# Altium PCB RBG_dot_matrix.PcbDoc
Units mm, origin at the board's own origin, x right, y up, seen from the top; angles counter-clockwise.
Board outline 91.19 x 99.31 mm, 2 copper layers (Top Layer, Bottom Layer); 86 components, 139 nets, 322 pads, 100 vias.
Unrouted connection lines stored in the file: 13.
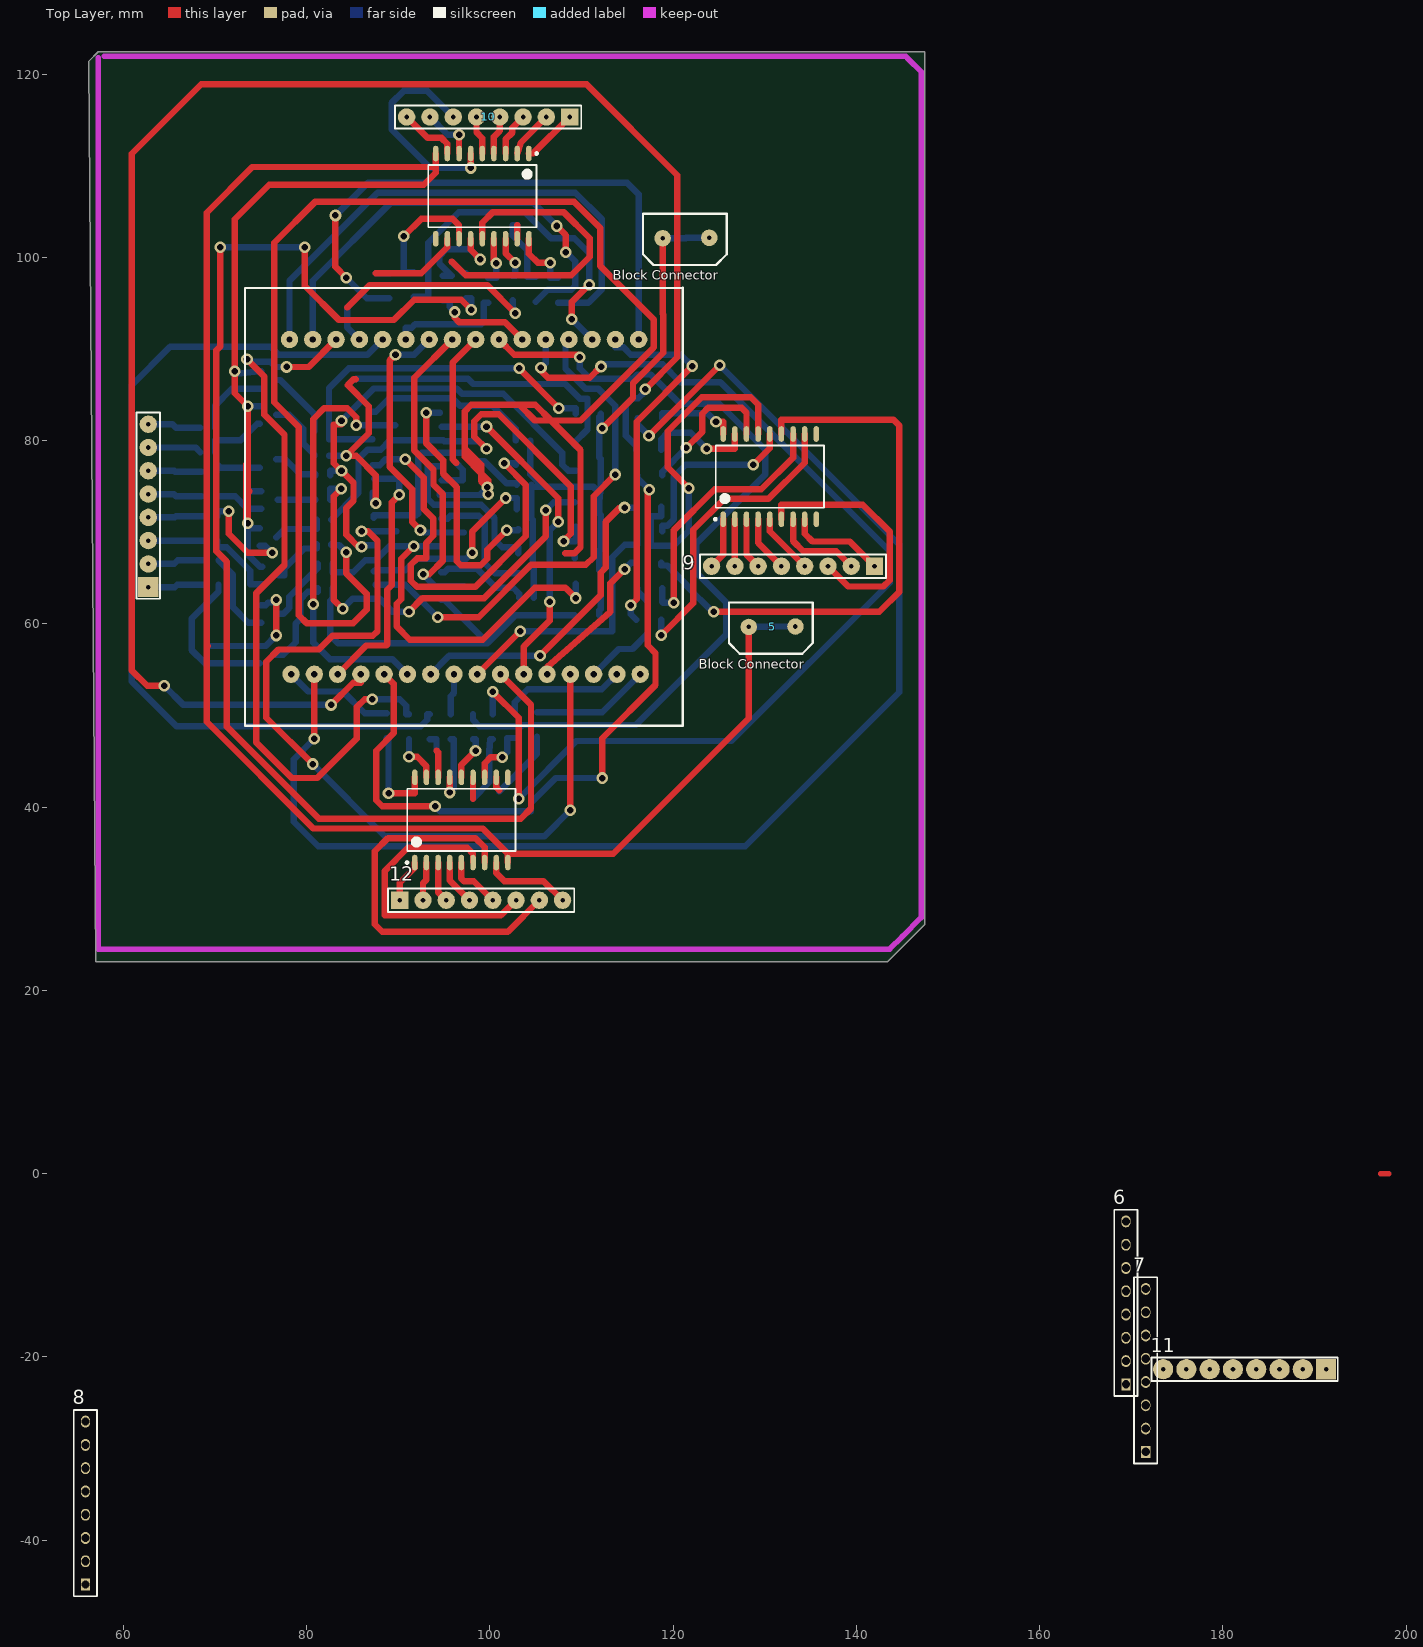
[diagram p0: Top Layer view]
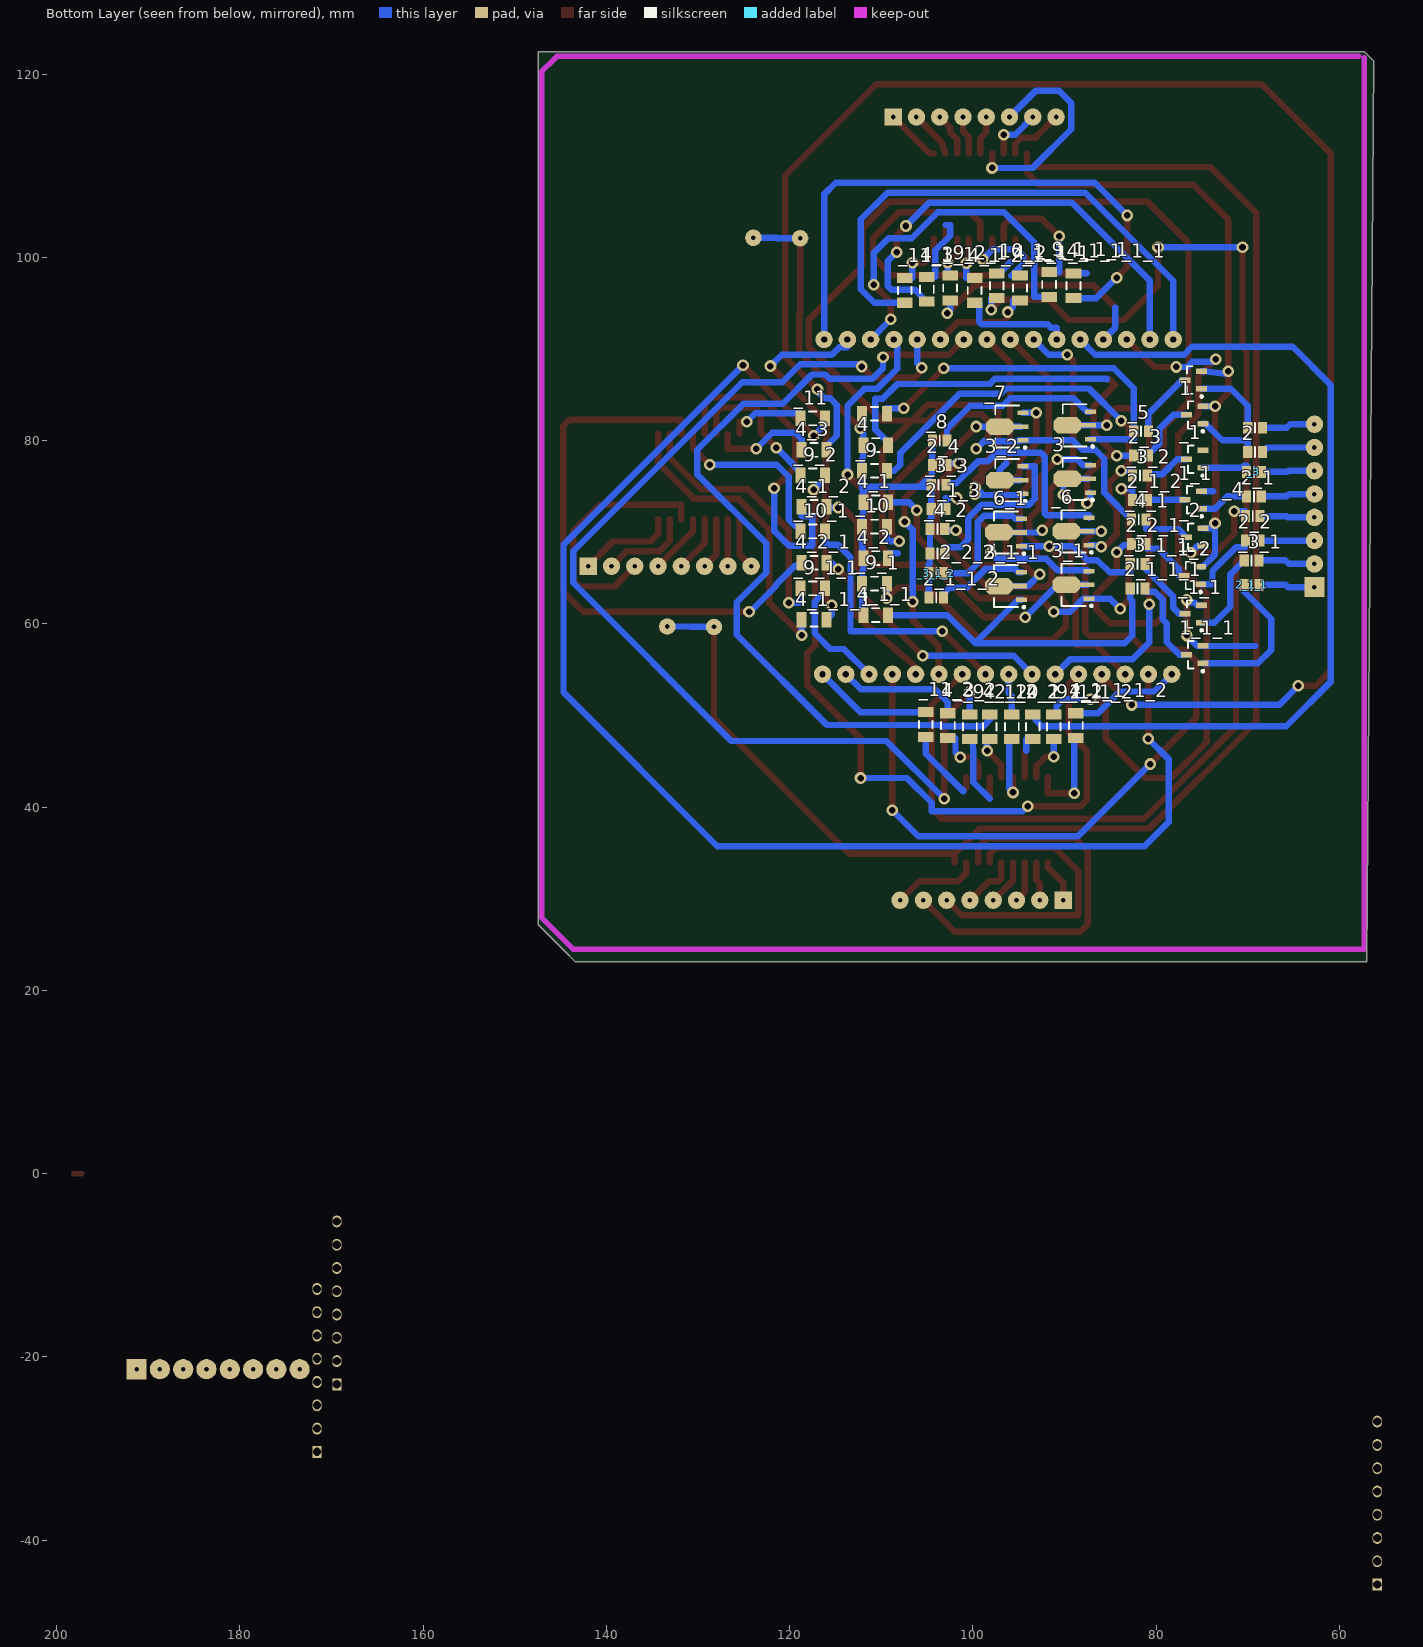
[diagram p1: Bottom Layer view, seen from below]

## Layer stack, top to bottom
Top Layer: signal copper 0.0356
Dielectric: dielectric 0.32, FR-4, Dk 4.8
Bottom Layer: signal copper 0.0356

## Board outline
56.261,121.412 57.277,122.428 147.447,122.428 147.447,27.178 144.653,24.384 143.383,23.114 57.023,23.114

## Design rules (kind name [scope] priority, off if disabled: settings)
Clearance [All] p1: gap=0.35
PolygonConnect [All] p1: connectstyle=Relief reliefconductorwidth=0.254 reliefentries=4 polygonreliefangle="90 Angle"
RoutingVias [All] p1: holewidth=0.711 width=1.27 viastyle="Through Hole" minholewidth=0.711 minwidth=1.27 maxholewidth=0.711 maxwidth=1.27
SilkscreenOverComponentPads [All] p1: minsilkscreentomaskgap=0.254
SolderMaskExpansion [All] p1: expansion=0.102
Width [All] p1: maxlimit=0.8 minlimit=0.6 preferedwidth=0.7
27 further rules are at their usual default settings.

## Components (designator, comment, footprint, x,y, rotation, side; value= is the part's Value field where it differs from the comment)
1 "Comment" sot23-3l 75.819,82.804 r0 bottom
1_1 "Comment" sot23-3l 75.946,73.533 r0 bottom
1_1_1 "Comment" sot23-3l 75.819,56.642 r0 bottom
1_2 "Comment" sot23-3l 76.073,65.278 r0 bottom
2 "Comment" resc2012l 69.215,78.74 r0 bottom
2_1 "Comment" resc2012l 69.342,73.914 r0 bottom
2_1_1 "Comment" resc2012l 69.596,64.262 r0 bottom
2_1_1_1 "Comment" resc2012l 82.042,63.881 r0 bottom
2_1_1_2 "Comment" resc2012l 104.013,62.865 r0 bottom
2_1_2 "Comment" resc2012l 81.788,73.533 r0 bottom
2_1_3 "Comment" resc2012l 103.759,72.517 r0 bottom
2_2 "Comment" resc2012l 69.469,69.088 r0 bottom
2_2_1 "Comment" resc2012l 81.915,68.707 r0 bottom
2_2_2 "Comment" resc2012l 103.886,67.691 r0 bottom
2_3 "Comment" resc2012l 81.661,78.359 r0 bottom
2_4 "Comment" resc2012l 103.632,77.343 r0 bottom
3 "Comment" sot89l 88.9,75.819 r0 bottom
3_1 "Comment" sot89l 89.027,64.262 r0 bottom
3_1_1 "Comment" sot89l 96.393,64.135 r0 bottom
3_2 "Comment" sot89l 96.266,75.692 r0 bottom
4 "Comment" resc3216l 110.617,79.502 r0 bottom
4_1 "Comment" resc3216l 110.617,73.279 r0 bottom
4_1_1 "Comment" resc3216l 110.617,60.96 r0 bottom
4_1_1_1 "Comment" resc3216l 117.348,60.452 r0 bottom
4_1_1_1_1 "Comment" resc3216l 89.027,96.901 r90 bottom
4_1_1_1_2 "Comment" resc3216l 88.773,48.895 r90 bottom
4_1_2 "Comment" resc3216l 117.348,72.771 r0 bottom
4_1_2_1 "Comment" resc3216l 99.822,96.393 r90 bottom
4_1_2_2 "Comment" resc3216l 98.171,48.768 r90 bottom
4_2 "Comment" resc3216l 110.617,67.183 r0 bottom
4_2_1 "Comment" resc3216l 117.348,66.675 r0 bottom
4_2_1_1 "Comment" resc3216l 94.869,96.647 r90 bottom
4_2_1_2 "Comment" resc3216l 93.472,48.768 r90 bottom
4_3 "Comment" resc3216l 117.348,78.994 r0 bottom
4_3_1 "Comment" resc3216l 105.029,96.52 r90 bottom
4_3_2 "Comment" resc3216l 102.743,48.895 r90 bottom
5 "Comment" "pcb block connector" 130.81,59.69 r0 top
6 "Comment" HDR1X8#1 169.418,-22.987 r90 top
7 "Comment" HDR1X8#1 171.577,-30.353 r90 top
8 "Comment" HDR1X8#1 55.88,-44.831 r90 top
9 "Comment" HDR1X8#2 141.986,66.294 r180 top
10 "Comment" HDR1X8#2 108.712,115.316 r180 top
11 "Comment" HDR1X8#3 191.262,-21.336 r180 top
12 "Comment" HDR1X8#2 90.17,29.845 r0 top
_1 "Comment" sot23-3l 75.819,77.978 r0 bottom
_1_1 "Comment" sot23-3l 75.946,61.087 r0 bottom
_2 "Comment" sot23-3l 75.819,69.469 r0 bottom
_3 "Comment" resc2012l 69.342,76.581 r0 bottom
_3_1 "Comment" resc2012l 69.596,66.929 r0 bottom
_3_1_1 "Comment" resc2012l 82.042,66.548 r0 bottom
_3_1_2 "Comment" resc2012l 104.013,65.532 r0 bottom
_3_2 "Comment" resc2012l 81.788,76.2 r0 bottom
_3_3 "Comment" resc2012l 103.759,75.184 r0 bottom
_4 "Comment" resc2012l 69.469,71.755 r0 bottom
_4_1 "Comment" resc2012l 81.915,71.374 r0 bottom
_4_2 "Comment" resc2012l 103.886,70.358 r0 bottom
_5 "Comment" resc2012l 81.661,81.026 r0 bottom
_6 "Comment" sot89l 89.027,70.104 r0 bottom
_6_1 "Comment" sot89l 96.393,69.977 r0 bottom
_7 "Comment" sot89l 96.266,81.534 r0 bottom
_8 "Comment" resc2012l 103.632,80.01 r0 bottom
_9 "Comment" resc3216l 110.744,76.708 r0 bottom
_9_1 "Comment" resc3216l 110.744,64.389 r0 bottom
_9_1_1 "Comment" resc3216l 117.475,63.881 r0 bottom
_9_1_1_1 "Comment" resc3216l 91.694,97.028 r90 bottom
_9_1_1_2 "Comment" resc3216l 91.186,48.768 r90 bottom
_9_2 "Comment" resc3216l 117.475,76.2 r0 bottom
_9_2_1 "Comment" resc3216l 102.489,96.647 r90 bottom
_9_2_2 "Comment" resc3216l 100.33,48.768 r90 bottom
_10 "Comment" resc3216l 110.744,70.612 r0 bottom
_10_1 "Comment" resc3216l 117.475,70.104 r0 bottom
_10_1_1 "Comment" resc3216l 97.409,96.901 r90 bottom
_10_1_2 "Comment" resc3216l 95.758,48.768 r90 bottom
_11 "Comment" resc3216l 117.475,82.423 r0 bottom
_11_1 "Comment" resc3216l 107.442,96.393 r90 bottom
_11_2 "Comment" resc3216l 105.156,49.022 r90 bottom
? "Comment" soic127p1030-18al 96.901,38.608 r90 top
? "Comment" soic127p1030-18al 99.187,106.68 r270 top
? "Comment" soic127p1030-18al 130.556,76.073 r90 top
? "Comment" "pcb block connector" 121.412,102.108 r0 top
? "Comment" HDR1X8#4 62.738,64.008 r90 top
? "Comment" sot89l 88.9,81.661 r0 bottom
? "Comment" sot23-3l 75.946,86.614 r0 bottom
? "Comment" resc3216l 110.744,82.931 r0 bottom
? "Comment" resc2012l 69.215,81.407 r0 bottom
? "Comment" "RGB 4.7X4.7" 97.282,72.771 r180 top

## Footprints (in the part's own frame and the unit in brackets; to place one, negate y for a bottom-side part, rotate by r counter-clockwise, add the part's x,y. Pads: shape width x height; smd on the part's side, far side on the other; paste and mask are expansions set on the pad)
HDR1X8#1 [mm] "Connector; Header; 8 Position"
  rect 1.3x1 hole 0.9: 1(0,0)
  oval 1.3x1 hole 0.9: 2(2.54,0) 3(5.08,0) 4(7.62,0) 5(10.16,0) 6(12.7,0) 7(15.24,0) 8(17.78,0)
  silkscreen extent -1.27,-1.27 19.05,1.27
HDR1X8#2 [mm] "Connector; Header; 8 Position"
  rect 1.9x1.9 hole 0.5: 1(0,0)
  round 1.9 hole 0.5: 2(2.54,0) 3(5.08,0) 4(7.62,0) 5(10.16,0) 6(12.7,0) 7(15.24,0) 8(17.78,0)
  silkscreen extent -1.27,-1.27 19.05,1.27
HDR1X8#3 [mm] "Connector; Header; 8 Position"
  rect 2.2x2.2 hole 0.5: 1(0,0)
  round 2.2 hole 0.5: 2(2.54,0) 3(5.08,0) 4(7.62,0) 5(10.16,0) 6(12.7,0) 7(15.24,0) 8(17.78,0)
  silkscreen extent -1.27,-1.27 19.05,1.27
HDR1X8#4 [mm] "Connector; Header; 8 Position"
  rect 2.2x2.2 hole 0.5: 1(0,0)
  round 1.9 hole 0.5: 2(2.54,0) 3(5.08,0) 4(7.62,0) 5(10.16,0) 6(12.7,0) 7(15.24,0) 8(17.78,0)
  silkscreen extent -1.27,-1.27 19.05,1.27
"pcb block connector" [mm]
  round 1.8 hole 0.5: 1(-2.547,-0.023) 2(2.547,0.023)
  silkscreen extent -4.7,-2.94 4.44,2.65
resc2012l [mm] "Chip Resistor, Body 2.0x1.3mm, IPC High Density"
  rect 1x1.3 smd: 1(-0.8,0) 2(0.8,0)
  silkscreen extent 0,-0.55 0,0.55, body extent -1.07,-0.7 1.07,0.7, height 0.65
resc3216l [mm] "Chip Resistor, Body 3.2x1.6mm, IPC High Density"
  rect 1.1x1.7 smd: 1(-1.35,0) 2(1.35,0)
  silkscreen extent -0.4,-0.75 0.4,0.75, body extent -1.68,-0.87 1.68,0.87, height 0.71
"RGB 4.7X4.7" [mm]
  round 1.9 hole 0.7: 1(-18.966,-18.262) 2(-16.426,-18.262) 3(-13.886,-18.262) 4(-11.346,-18.262) 5(-8.806,-18.262) 6(-6.266,-18.262) 7(-3.726,-18.262) 8(-1.186,-18.262) 9(1.354,-18.262) 10(3.894,-18.262) 11(6.434,-18.262) 12(8.974,-18.262) 13(11.514,-18.262) 14(14.054,-18.262) 15(16.594,-18.262) 16(19.134,-18.262) 17(18.966,18.262) 18(16.426,18.262) 19(13.886,18.262) 20(11.346,18.262) 21(8.806,18.262) 22(6.266,18.262) 23(3.726,18.262) 24(1.186,18.262) 25(-1.354,18.262) 26(-3.894,18.262) 27(-6.434,18.262) 28(-8.974,18.262) 29(-11.514,18.262) 30(-14.054,18.262) 31(-16.594,18.262) 32(-19.134,18.262)
  silkscreen extent -23.78,-23.9 23.99,23.89
soic127p1030-18al [mm] "SOIC, 18-Leads, Body 11.6x7.5mm, Pitch 1.27mm, IPC High Density"
  oval 1.7x0.6 smd: 1(-4.65,5.08) 2(-4.65,3.81) 3(-4.65,2.54) 4(-4.65,1.27) 5(-4.65,0) 6(-4.65,-1.27) 7(-4.65,-2.54) 8(-4.65,-3.81) 9(-4.65,-5.08) 10(4.65,-5.08) 11(4.65,-3.81) 12(4.65,-2.54) 13(4.65,-1.27) 14(4.65,0) 15(4.65,1.27) 16(4.65,2.54) 17(4.65,3.81) 18(4.65,5.08)
  silkscreen extent -4.77,-5.9 3.4,6.05, body extent -3.8,-5.85 3.8,5.85, height 2.65
sot23-3l [mm] "SOT23, 3-Leads, Body 2.9x1.3mm, Pitch 0.95mm, Lead Span 2.5mm, IPC High Density"
  rect 1.2x0.6 smd: 1(-0.9,0.95) 2(-0.9,-0.95) 3(0.9,0)
  silkscreen extent -1.02,-1.5 0.7,1.92, body extent -0.7,-1.5 0.7,1.5, height 1.1
sot89l [mm] "SOT89, 3-Leads, Body 4.5x2.4 mm, Pitch 1.5mm, Lead Span 4.1mm, IPC High Density"
  rect 1.2x0.5 smd: 1(-1.7,1.5) 3(-1.7,-1.5)
  rect 1.6x0.5 smd: 2(-1.5,0)
  oct 3x1.8 smd: 2(0.8,0)
  silkscreen extent -2.07,-2.3 1.3,2.42, body extent -1.3,-2.3 1.3,2.3, height 1.6

## Via types
v1: diameter 1.27, hole 0.711, Top Layer to Bottom Layer, 100 vias

## Nets (pads, with @x,y where several pads share a name; then routed paths per layer and width w, separated by ;. In a path a pad name is that pad's centre, name@x,y a point inside that pad or via, vN(x,y) a via of type N, cw(c..) or ccw(c..) an arc to the next point about the centre after c; other vN are vias at no path point)
a1: ?.1@68.415,81.407 ?.8@62.738,81.788 | length 5.8
  Bottom Layer w0.7: ?.8@62.738,81.788 65.38,81.788 65.761,81.407 ?.1@68.415,81.407
a2: 2.1 ?.7@62.738,79.248 | length 5.9
  Bottom Layer w0.7: ?.7@62.738,79.248 67.907,79.248 2.1
a3: ?.6@62.738,76.708 _3.1 | length 5.9
  Bottom Layer w0.7: ?.6@62.738,76.708 65.557,76.708 65.684,76.581 _3.1
a4: 2_1.1 ?.5@62.738,74.168 | length 5.9
  Bottom Layer w0.7: ?.5@62.738,74.168 65.507,74.168 65.761,73.914 2_1.1
a5: ?.4@62.738,71.628 _4.1 | length 6
  Bottom Layer w0.7: ?.4@62.738,71.628 65.634,71.628 65.761,71.755 _4.1
a6: 2_2.1 ?.3@62.738,69.088 | length 5.9
  Bottom Layer w0.7: ?.3@62.738,69.088 2_2.1
a7: ?.2@62.738,66.548 _3_1.1 | length 6.2
  Bottom Layer w0.7: ?.2@62.738,66.548 65.557,66.548 65.938,66.929 _3_1.1
a8: 2_1_1.1 ?.1@62.738,64.008 | length 6.2
  Bottom Layer w0.7: ?.1@62.738,64.008 65.634,64.008 65.888,64.262 2_1_1.1
c1: 10.1 ?.1@104.267,111.33 | length 6.1
  Top Layer w0.7: ?.1@104.267,111.33 104.726,111.33 10.1
c2: 10.2 ?.2@102.997,111.33 | length 5.2
  Top Layer w0.7: ?.2@102.997,111.33 103.429,112.573 10.2
c3: 10.3 ?.3@101.727,111.33 | length 4.8
  Top Layer w0.7: ?.3@101.727,111.33 101.727,112.878 102.472,113.623 102.472,114.156 10.3
c4: 10.4 ?.4@100.457,111.33 | length 4.2
  Top Layer w0.7: ?.4@100.457,111.33 100.457,113.158 101.092,113.793 10.4
c5: 10.5 ?.5@99.187,111.33 | length 4.2
  Top Layer w0.7: 10.5 98.552,113.64 99.187,113.005 ?.5@99.187,111.33
c6: 10.6 ?.6@97.917,111.33 | length 23.3
  Top Layer w0.7: v1(97.917,109.753) ?.6@97.917,111.33
  Bottom Layer w0.7: 10.6 93.167,118.161 90.602,118.161 89.281,116.84 89.281,113.97 93.497,109.753 v1(97.917,109.753)
c7: 10.7 ?.7@96.647,111.33 | length 6
  Top Layer w0.7: ?.7@96.647,111.33 v1(96.647,113.386)
  Bottom Layer w0.7: 10.7 95.402,113.386 v1(96.647,113.386)
c8: 10.8 ?.8@95.377,111.33 | length 6.7
  Top Layer w0.7: 10.8 93.218,113.03 94.742,113.03 95.377,112.395 ?.8@95.377,111.33
cc1: 9.8 ?.1@125.476,71.423 | length 5.7
  Top Layer w0.7: 9.8 125.476,67.564 ?.1@125.476,71.423
cc2: 9.7 ?.2@126.746,71.423 | length 5.1
  Top Layer w0.7: 9.7 ?.2@126.746,71.423
cc3: 9.6 ?.3@128.016,71.423 | length 5.7
  Top Layer w0.7: ?.3@128.016,71.423 128.016,67.564 9.6
cc4: 9.5 ?.4@129.286,71.423 | length 6.2
  Top Layer w0.7: ?.4@129.286,71.423 129.286,68.834 9.5
cc5: 9.4 ?.5@130.556,71.423 | length 6.7
  Top Layer w0.7: ?.5@130.556,71.423 130.556,70.104 9.4
cc6: 9.3 ?.6@131.826,71.423 | length 27.8
  Top Layer w0.7: ?.6@131.826,71.423 131.826,73 140.716,73 143.637,70.079 143.637,64.77 142.951,64.084 139.116,64.084 9.3
cc7: 9.2 ?.7@133.096,71.423 | length 9.9
  Top Layer w0.7: ?.7@133.096,71.423 133.096,69.049 134.201,67.944 137.796,67.944 9.2
cc8: 9.1 ?.8@134.366,71.423 | length 10.7
  Top Layer w0.7: ?.8@134.366,71.423 134.366,69.85 135.222,68.994 139.286,68.994 9.1
e1: ?.3@87.2,83.161 _8.1 | length 18.9
  Bottom Layer w0.7: ?.3@87.2,83.161 87.554,83.161 89.026,84.633 95.936,84.633 96.749,83.82 100.292,83.82 102.832,81.28 _8.1
e2: 2_4.1 3.3 | length 45.4
  Top Layer w0.7: v1(90.793,77.953) 92.806,75.94 92.806,72.537 93.842,71.501 93.842,69.603 93.047,68.809 93.047,67.142 92.075,67.142 91.389,66.456 91.389,64.719 92.075,64.033 98.4,64.033 103.937,69.571 103.937,75.159 v1(101.575,77.521)
  Bottom Layer w0.7: 3.3 87.986,77.319 88.619,77.953 v1(90.793,77.953) ; v1(101.575,77.521) 102.832,77.521 2_4.1
e3: _3_3.1 _6.3 | length 23.9
  Bottom Layer w0.7: _6.3 87.325,71.604 87.325,71.842 91.985,71.842 92.177,72.034 92.177,78.257 92.583,78.664 97.423,78.664 98.32,77.766 99.399,77.766 101.829,75.336 102.959,75.336 _3_3.1
e4: 2_1_3.1 3_1.3 | length 21.6
  Top Layer w0.7: v1(98.069,67.742) 98.069,70.053 v1(101.752,73.736)
  Bottom Layer w0.7: 3_1.3 87.528,65.762 87.528,65.862 90.78,65.862 92.024,67.107 97.434,67.107 v1(98.069,67.742) ; v1(101.752,73.736) 102.959,73.736 2_1_3.1
e5: _4_2.1 _7.3 | length 28.2
  Top Layer w0.7: v1(93.087,83.034) 93.087,79.687 94.906,77.868 94.906,76.416 96.393,74.929 96.393,66.839 96.83,66.402 99.015,66.402 99.729,67.116 99.729,68.106 v1(101.854,70.231)
  Bottom Layer w0.7: v1(93.087,83.034) _7.3 ; v1(101.854,70.231) 103.086,70.231 _4_2.1
e6: 2_2_2.1 3_2.3 | length 18.9
  Bottom Layer w0.7: 3_2.3 93.243,77.192 93.243,73.66 93.887,73.016 99.06,73.016 100.519,71.557 100.519,69.215 101.357,68.377 103.086,68.377 2_2_2.1
e7: _3_1_2.1 _6_1.3 | length 13.9
  Bottom Layer w0.7: _6_1.3 95.396,71.477 95.71,71.791 98.798,71.791 99.469,71.12 99.469,66.633 100.57,65.532 _3_1_2.1
e8: 2_1_1_2.1 3_1_1.3 | length 10.2
  Bottom Layer w0.7: 3_1_1.3 95.069,65.635 95.474,66.04 98.577,66.04 100.689,63.929 102.556,63.929 103.213,63.271 2_1_1_2.1
ee1: 4_1_1_1_2.1 ?.18@91.821,43.258 | length 10.8
  Top Layer w0.7: v1(88.951,41.509) 91.821,41.509 ?.18@91.821,43.258
  Bottom Layer w0.7: 4_1_1_1_2.1 88.951,47.545 v1(88.951,41.509)
ee2: ?.17@93.091,43.258 _9_1_1_2.1 | length 5.5
  Top Layer w0.7: v1(91.186,45.491) 92.075,45.491 93.091,44.475 ?.17@93.091,43.258
  Bottom Layer w0.7: v1(91.186,45.491) _9_1_1_2.1
ee3: 4_2_1_2.1 ?.16@94.361,43.258 | length 4.9
  Top Layer w0.7: 94.183,46.177 94.361,45.999 ?.16@94.361,43.258
  Bottom Layer w0.7: 4_2_1_2.1 94.183,47.418 94.183,46.177
ee4: ?.15@95.631,43.258 _10_1_2.1 | length 7.9
  Top Layer w0.7: v1(95.631,41.605) ?.15@95.631,43.258
  Bottom Layer w0.7: v1(95.631,41.605) 96.063,42.037 96.063,47.418 _10_1_2.1
ee5: 4_1_2_2.1 ?.14@96.901,43.258 | length 5.1
  Top Layer w0.7: ?.14@96.901,43.258 96.901,44.602 v1(98.45,46.152)
  Bottom Layer w0.7: 4_1_2_2.1 98.476,47.418 98.476,46.177 v1(98.45,46.152)
ee6: ?.13@98.171,43.258 _9_2_2.1 | length 9.8
  Top Layer w0.7: 98.171,40.937 ?.13@98.171,43.258
  Bottom Layer w0.7: 98.171,40.937 99.958,42.724 99.958,46.06 100.051,47.418 _9_2_2.1
ee7: 4_3_2.1 ?.12@99.441,43.258 | length 6.9
  Top Layer w0.7: ?.12@99.441,43.258 99.441,44.806 100.101,45.466 v1(101.371,45.466)
  Bottom Layer w0.7: v1(101.371,45.466) 101.905,45.999 101.905,47.545 4_3_2.1
ee8: ?.11@100.711,43.258 _11_2.1 | length 9.4
  Top Layer w0.7: ?.11@100.711,43.258 100.711,42.164 101.041,41.834
  Bottom Layer w0.7: 101.041,41.834 101.041,41.707 105.156,45.822 _11_2.1
g: 1.2 1_1.2 1_1_1.2 1_2.2 5.1 5.2 ?.2@75.046,87.564 ?.9@94.107,111.33 ?.9@101.981,33.958 _1.2 _1_1.2 _2.2 | length 266.5
  Top Layer w0.7: 69.205,57.592 69.099,57.698 ; v1@73.431,71.12 73.431,77.419 73.584,74.676 ; v1(73.584,70.968) 73.584,74.676 ; 73.777,74.483 73.584,74.676 ; v1(76.683,58.735) v1(76.683,62.611) ; ?.9@94.107,111.33 94.107,109.855 ; ?.9@101.981,33.958 101.981,34.925 ; 5.1 128.263,49.701 113.487,34.925 101.981,34.925 ; 69.099,57.698 69.099,104.862 74.092,109.855 94.107,109.855 ; 69.099,57.698 69.099,49.326 80.748,37.677 99.229,37.677 101.981,34.925 ; 73.584,74.676 v1(73.584,83.754) 72.161,85.176 v1(72.161,87.564) 72.161,104.14 75.946,107.925 92.812,107.925 94.107,109.22 94.107,109.855
  Bottom Layer w0.7: 69.205,57.592 1_1_1.2 75.54,57.592 v1(76.683,58.735) ; v1(72.161,87.564) 72.443,87.283 74.86,87.564 ?.2@75.046,87.564 ; v1@73.431,71.12 v1(73.584,70.968) ; v1(73.584,83.754) 1.2 ; 73.777,74.483 1_1.2 ; _2.2 74.132,70.419 ; _1_1.2 75.54,62.037 75.834,62.332 76.403,62.332 v1(76.683,62.611) ; 1_2.2 74.93,66.228 73.584,67.574 v1@73.584,70.419 ; 5.1 130.785,59.667 130.83,59.713 5.2 ; v1@73.584,70.419 v1(73.584,70.968) ; v1@73.584,70.419 74.132,70.419 ; v1(73.584,70.968) 74.132,70.419
g1: 
g2: 
g3: 
g4: 
g5: 
g6: 
g7: 
g8: 
h1: ?.2@87.4,81.661 ?.2@89.7,81.661 ?.22 | length 46.8
  Top Layer w0.7: v1(80.747,62.128) 80.747,82.347 81.915,83.515 84.455,83.515 85.42,82.55 v1(85.42,81.661)
  Bottom Layer w0.7: v1(80.747,62.128) 80.747,57.963 82.55,56.159 89.365,56.159 ?.22 ; v1(85.42,81.661) 87.4,81.661 ?.2@89.7,81.661
h2: 3.2 ?.19 | length 28.1
  Top Layer w0.7: ?.19 86.53,57.644 88.697,57.644 88.801,57.748 88.801,63.726 89.289,64.214 89.289,73.254 v1(90.119,74.084)
  Bottom Layer w0.7: 3.2@87.4,75.819 89.7,75.819 90.119,75.819 v1(90.119,74.084)
h3: ?.29 _6.2 | length 90.1
  Top Layer w0.7: v1(80.67,44.704) 75.615,49.759 75.615,55.88 76.945,57.209 81.349,57.209 82.834,58.694 87.243,58.694 87.751,59.202 87.751,69.068 86.715,70.104 v1(86.004,70.104) ; v1(108.796,39.657) ?.29
  Bottom Layer w0.7: v1(80.67,44.704) 88.544,36.83 105.969,36.83 v1(108.796,39.657) ; v1(86.004,70.104) 87.527,70.104 _6.2@89.827,70.104
h4: 3_1.2 ?.4@108.628,91.033 | length 55.9
  Top Layer w0.7: v1(94.31,60.731) 98.792,60.731 104.507,66.446 110.49,66.446 111.333,67.29 111.333,73.945 v1(113.69,76.302)
  Bottom Layer w0.7: 3_1.2@87.527,64.262 89.827,64.262 90.78,64.262 v1(94.31,60.731) ; ?.4@108.628,91.033 108.266,90.67 108.266,87.844 110.469,85.641 111.869,85.641 113.69,83.82 v1(113.69,76.302)
h5: ?.27 _7.2 | length 36.7
  Top Layer w0.7: v1(99.644,81.534) 107.467,73.711 v1(107.467,71.145) ; ?.27 103.716,57.525 106.553,60.362 v1(106.553,62.408)
  Bottom Layer w0.7: _7.2@94.766,81.534 97.066,81.534 v1(99.644,81.534) ; v1(106.553,62.408) 106.553,70.231 v1(107.467,71.145)
h6: 3_2.2 ?.8@98.468,91.033 | length 19.1
  Top Layer w0.7: 96.342,77.559 95.956,77.946 95.956,88.52 ?.8@98.468,91.033
  Bottom Layer w0.7: 3_2.2@94.766,75.692 97.066,75.692 97.066,76.836 96.342,77.559
h7: ?.10@93.388,91.033 _6_1.2 | length 30
  Top Layer w0.7: v1(89.713,89.383) 89.064,88.733 89.064,77.159 91.544,74.678 91.544,71.118 v1(92.435,70.227)
  Bottom Layer w0.7: v1(89.713,89.383) 91.738,89.383 ?.10@93.388,91.033 ; v1(92.435,70.227) 92.685,69.977 94.893,69.977 _6_1.2@97.193,69.977
h8: 3_1_1.2 ?.9@95.928,91.033 | length 34.9
  Top Layer w0.7: v1(92.724,65.405) 93.387,65.405 94.892,66.909 94.892,74.132 93.856,75.169 93.856,76.818 91.752,78.922 91.752,86.856 ?.9@95.928,91.033
  Bottom Layer w0.7: v1(92.724,65.405) 93.994,64.135 94.893,64.135 3_1_1.2@97.193,64.135
j1: ?.16@78.148,91.033 _11_1.1 | length 58.7
  Bottom Layer w0.7: ?.16@78.148,91.033 78.148,97.452 87.757,107.061 109.322,107.061 112.243,104.14 112.243,96.52 110.766,95.043 _11_1.1
j2: 4_3_1.1 ?.15@80.688,91.033 | length 50
  Top Layer w0.7: v1(107.315,103.42) 108.306,102.429 v1(108.306,100.575)
  Bottom Layer w0.7: ?.15@80.688,91.033 80.688,97.452 89.214,105.977 104.757,105.977 v1(107.315,103.42) ; 4_3_1.1 106.328,96.469 108.89,96.469 109.322,96.901 109.322,99.559 v1(108.306,100.575)
j3: ?.13@85.768,91.033 _9_2_1.1 | length 26.2
  Top Layer w0.7: 84.455,94.531 86.901,96.977 99.72,96.977 v1(102.794,93.904)
  Bottom Layer w0.7: 84.455,94.531 84.455,92.346 ?.13@85.768,91.033 ; _9_2_1.1 102.489,94.209 v1(102.794,93.904)
j4: 4_1_2_1.1 ?.11@90.848,91.033 | length 12.6
  Bottom Layer w0.7: ?.11@90.848,91.033 90.848,92.329 91.491,92.329 91.846,92.685 99.063,92.685 99.328,92.95 99.328,95.043 4_1_2_1.1
j5: ?.26 _10_1_1.1 | length 143.2
  Top Layer w0.7: v1(70.587,101.092) 70.587,90.272 70.155,89.84 70.155,67.945 71.298,66.802 71.298,48.793 81.356,38.735 103.375,38.735 104.496,39.855 104.496,51.189 ?.26 ; v1(79.807,101.092) 79.807,96.901 83.541,93.167 89.535,93.167 91.745,95.377 96.901,95.377 v1(97.993,94.285)
  Bottom Layer w0.7: v1(70.587,101.092) v1(79.807,101.092) ; _10_1_1.1 97.993,95.551 v1(97.993,94.285)
j6: 4_2_1_1.1 ?.6@103.548,91.033 | length 11.2
  Top Layer w0.7: v1(96.19,94.031) 96.19,93.396 96.647,92.939 101.643,92.939 ?.6@103.548,91.033
  Bottom Layer w0.7: 4_2_1_1.1 95.631,95.297 95.631,94.59 v1(96.19,94.031)
j7: ?.3@111.168,91.033 _9_1_1_1.1 | length 39.4
  Top Layer w0.7: v1(108.966,93.235) 108.966,95.148 v1(110.846,97.028)
  Bottom Layer w0.7: _9_1_1_1.1 93.294,95.678 93.294,101.6 96.622,104.927 103.837,104.927 106.68,102.085 109.22,102.085 110.846,100.459 v1(110.846,97.028) ; v1(108.966,93.235) ?.3@111.168,91.033
j8: 4_1_1_1_1.1 ?.1@116.248,91.033 | length 63.8
  Top Layer w0.7: v1(83.16,104.572) 83.16,98.958 v1(84.328,97.79)
  Bottom Layer w0.7: v1(83.16,104.572) 86.716,108.128 114.986,108.128 116.248,106.865 ?.1@116.248,91.033 ; v1(84.328,97.79) 86.567,95.551 4_1_1_1_1.1
k1: ?.18@80.856,54.509 _11.1 | length 148.3
  Top Layer w0.7: v1(80.856,47.455) ?.18@80.856,54.509 ; v1(117.373,80.518) v1(125.095,88.24)
  Bottom Layer w0.7: v1(80.856,47.455) 78.613,45.212 78.613,38.405 81.28,35.738 127.889,35.738 144.686,52.535 144.686,68.649 v1(125.095,88.24) ; _11.1 116.125,81.766 v1(117.373,80.518)
k2: 4_3.1 ?.20 | length 184.8
  Top Layer w0.7: v1(64.491,53.238) 62.611,53.238 60.935,54.915 60.935,111.303 68.504,118.872 110.566,118.872 120.472,108.966 120.472,89.091 v1(116.967,85.586) ; v1(82.677,51.156) 85.115,53.594 85.936,53.594 ?.20
  Bottom Layer w0.7: v1(64.491,53.238) 66.573,51.156 v1(82.677,51.156) ; 4_3.1 115.998,79.375 114.859,80.514 114.859,83.896 115.57,84.607 116.205,84.607 116.967,85.369 v1(116.967,85.586)
k3: ?.21 _9_2.1 | length 78.5
  Top Layer w0.7: ?.21 89.535,53.45 89.535,48.096 87.605,46.166 87.605,40.767 88.265,40.107 v1(94.031,40.107) ; v1(112.268,43.179) 112.268,47.523 118.085,53.34 118.085,56.794 117.224,57.655 117.224,74.45 v1(117.399,74.625)
  Bottom Layer w0.7: v1(94.031,40.107) 94.57,39.567 104.499,39.567 104.499,40.465 107.213,43.179 v1(112.268,43.179) ; _9_2.1 116.125,75.899 v1(117.399,74.625)
k4: 4_1_2.1 ?.23 | length 34.4
  Top Layer w0.7: v1(105.486,56.515) 112.116,63.145 112.116,65.591 112.639,66.113 112.639,71.12 114.214,72.695 v1(114.706,72.695)
  Bottom Layer w0.7: ?.23 95.562,56.515 v1(105.486,56.515) ; v1(114.706,72.695) 115.998,72.695 4_1_2.1
k5: ?.25 _10_1.1 | length 29.5
  Top Layer w0.7: ?.25 v1(103.336,59.21)
  Bottom Layer w0.7: v1(103.336,59.21) 113.36,59.21 113.36,67.259 114.732,68.631 116.125,68.631 _10_1.1
k6: 4_2_1.1 ?.28 | length 16.8
  Top Layer w0.7: ?.28 106.256,55.295 113.166,61.316 113.166,64.439 v1(114.706,65.979)
  Bottom Layer w0.7: v1(114.706,65.979) 115.403,66.675 4_2_1.1
k7: ?.30 _9_1_1.1 | length 13.2
  Bottom Layer w0.7: ?.30 114.09,57.263 115.57,57.263 117.272,58.965 117.272,62.429 116.125,63.576 _9_1_1.1
k8: 4_1_1_1.1 ?.2@113.708,91.033 | length 40.8
  Top Layer w0.7: v1(115.392,62.027) 116.053,62.687 116.053,77.876 116.027,77.902 116.027,82.067 v1(122.098,88.138)
  Bottom Layer w0.7: ?.2@113.708,91.033 113.708,90.17 114.605,90.17 115.392,89.383 120.853,89.383 v1(122.098,88.138) ; v1(115.392,62.027) 115.392,61.058 4_1_1_1.1
l1: 4_1_1_1_2.2 ?.17@78.316,54.509 | length 12.2
  Bottom Layer w0.7: ?.17@78.316,54.509 80.203,52.622 83.983,52.622 86.36,50.245 4_1_1_1_2.2
l2: ?.14@83.228,91.033 _9_1_1_2.2 | length 81.4
  Top Layer w0.7: v1(73.508,88.875) 75.413,86.97 75.413,82.829 77.597,80.645 77.597,66.421 74.498,63.322 74.498,47.078 78.396,43.18 81.19,43.18 85.496,47.486 85.496,50.927 86.36,51.791 v1(87.173,51.791) ; v1(77.826,88.036) 80.232,88.036 ?.14@83.228,91.033
  Bottom Layer w0.7: v1(73.508,88.875) 73.508,88.614 76.054,88.614 76.632,88.036 v1(77.826,88.036) ; v1(87.173,51.791) 90.17,51.791 90.881,51.079 90.881,50.118 _9_1_1_2.2
l3: 4_2_1_2.2 ?.12@88.308,91.033 | length 97.9
  Bottom Layer w0.7: ?.12@88.308,91.033 86.658,89.383 76.96,89.383 76.109,90.234 65.113,90.234 60.935,86.055 60.935,53.721 65.811,48.844 92.481,48.844 93.167,49.53 93.167,50.118 4_2_1_2.2
l4: ?.24 _10_1_2.2 | length 4.5
  Bottom Layer w0.7: _10_1_2.2 95.758,52.121 96.096,52.458 ?.24
l5: 4_1_2_2.2 ?.7@101.008,91.033 | length 92.4
  Top Layer w0.7: ?.7@101.008,91.033 102.659,89.383 109.536,89.383 v1(109.815,89.103)
  Bottom Layer w0.7: 4_1_2_2.2 98.171,49.53 98.857,48.844 103.454,48.844 103.581,48.971 115.926,48.971 125.781,58.826 125.781,62.357 122.555,65.583 122.555,68.783 130.073,76.302 130.073,78.994 125.045,84.022 120.754,84.022 117.564,87.212 116.106,87.212 115.632,86.738 110.972,86.738 109.815,87.895 v1(109.815,89.103)
l6: ?.5@106.088,91.033 _9_2_2.2 | length 120
  Top Layer w0.7: v1(100.33,52.578) 103.149,49.759 v1(103.149,40.919) ; v1(105.588,87.935) 105.588,87.63 106.35,86.868 110.922,86.868 v1(112.141,88.087)
  Bottom Layer w0.7: _9_2_2.2 v1(100.33,52.578) ; v1(103.149,40.919) 109.449,47.219 126.365,47.219 143.636,64.49 143.636,67.921 125.171,86.385 120.802,86.385 118.855,88.333 112.387,88.333 v1(112.141,88.087) ; v1(105.588,87.935) 106.088,88.435 ?.5@106.088,91.033
l7: 4_3_2.2 ?.31 | length 13.6
  Bottom Layer w0.7: 4_3_2.2 102.743,51.46 104.14,52.857 112.224,52.857 ?.31
l8: ?.32 _11_2.2 | length 13
  Bottom Layer w0.7: _11_2.2 112.279,50.372 ?.32
NewNet: 
q1: ?.3@76.846,86.614 _5.1 | length 7.4
  Bottom Layer w0.7: ?.3@76.846,86.614 77.146,86.614 80.861,82.899 _5.1
q2: 1.3 2_3.1 | length 7
  Bottom Layer w0.7: 1.3 78.13,82.804 79.654,81.28 79.654,79.68 80.861,78.473 2_3.1
q3: _1.3 _3_2.1 | length 5.1
  Bottom Layer w0.7: _1.3 77.699,77.978 79.324,76.352 80.988,76.352 _3_2.1
q4: 1_1.3 2_1_2.1 | length 4.1
  Bottom Layer w0.7: 1_1.3 2_1_2.1
q5: _2.3 _4_1.1 | length 5.8
  Bottom Layer w0.7: _2.3 76.733,69.469 77.622,70.358 81.115,70.358 _4_1.1
q6: 1_2.3 2_2_1.1 | length 6.3
  Bottom Layer w0.7: 1_2.3 77.554,65.278 77.554,66.022 79.756,68.224 81.115,68.224 2_2_1.1
q7: _1_1.3 _3_1_1.1 | length 7.6
  Bottom Layer w0.7: _1_1.3 77.47,61.087 78.122,61.739 78.122,62.971 81.242,66.091 _3_1_1.1
q8: 1_1_1.3 2_1_1_1.1 | length 10.2
  Bottom Layer w0.7: 1_1_1.3 77.47,56.642 78.842,58.014 78.842,60.046 79.299,60.503 79.299,62.663 80.147,63.51 81.242,63.51 2_1_1_1.1
r1: 
r2: 
r3: 
r4: 
r5: 
r6: 
r7: 
r8: 
rr1: ?.18@125.476,80.723 _11.2 | length 8.9
  Top Layer w0.7: v1(124.689,82.042) 125.476,82.042 ?.18@125.476,80.723
  Bottom Layer w0.7: _11.2 118.825,82.972 123.758,82.972 v1(124.689,82.042)
rr2: 4_3.2 ?.17@126.746,80.723 | length 11.8
  Top Layer w0.7: v1(123.655,79.113) 126.746,79.113 ?.17@126.746,80.723
  Bottom Layer w0.7: 4_3.2 118.698,80.166 119.38,80.848 121.92,80.848 v1(123.655,79.113)
rr3: ?.16@128.016,80.723 _9_2.2 | length 16.2
  Top Layer w0.7: v1(121.449,79.207) 123.178,80.937 123.178,82.936 123.825,83.583 127.479,83.583 128.016,83.047 ?.16@128.016,80.723
  Bottom Layer w0.7: _9_2.2 118.825,76.584 v1(121.449,79.207)
rr4: 4_1_2.2 ?.15@129.286,80.723 | length 37
  Top Layer w0.7: v1(121.706,74.818) 119.42,77.103 119.42,81.016 123.146,84.742 128.471,84.742 129.286,83.927 ?.15@129.286,80.723
  Bottom Layer w0.7: 4_1_2.2 118.698,71.743 117.551,71.743 117.551,68.529 120.066,68.529 121.706,70.169 v1(121.706,74.818)
rr5: ?.14@130.556,80.723 _10_1.2 | length 20.1
  Top Layer w0.7: v1(128.738,77.354) 130.556,79.172 ?.14@130.556,80.723
  Bottom Layer w0.7: _10_1.2 118.825,70.688 119.38,70.688 120.091,71.399 120.091,76.048 121.398,77.354 v1(128.738,77.354)
rr6: 4_2_1.2 ?.13@131.826,80.723 | length 62.2
  Top Layer w0.7: v1(124.435,61.316) 142.519,61.316 144.704,63.5 144.704,81.61 144.018,82.296 131.826,82.296 ?.13@131.826,80.723
  Bottom Layer w0.7: 4_2_1.2 118.698,66.37 119.38,66.37 121.506,64.244 121.506,64.111 124.301,61.316 v1(124.435,61.316)
rr7: ?.12@133.096,80.723 _9_1_1.2 | length 29.6
  Top Layer w0.7: v1(120.097,62.306) 120.097,70.241 124.543,74.687 129.642,74.687 133.096,78.141 ?.12@133.096,80.723
  Bottom Layer w0.7: _9_1_1.2 118.825,62.386 118.905,62.306 v1(120.097,62.306)
rr8: 4_1_1_1.2 ?.11@134.366,80.723 | length 33
  Top Layer w0.7: v1(118.698,58.759) 122.214,62.275 122.214,70.257 125.593,73.637 130.401,73.637 134.366,77.602 ?.11@134.366,80.723
  Bottom Layer w0.7: v1(118.698,58.759) 4_1_1_1.2
s1: ?.1@75.046,85.664 ?.2@70.015,81.407 | length 8.2
  Bottom Layer w0.7: ?.2@70.015,81.407 70.015,83.82 71.859,85.664 ?.1@75.046,85.664
s2: 1.1 2.2 | length 7
  Bottom Layer w0.7: 2.2 70.015,80.035 72.807,80.035 74.625,81.854 1.1
s3: _1.1 _3.2 | length 5.6
  Bottom Layer w0.7: _3.2 70.142,77.281 70.38,77.281 70.633,77.028 _1.1
s4: 1_1.1 2_1.2 | length 5.5
  Bottom Layer w0.7: 2_1.2 72.229,73.914 73.56,72.583 1_1.1
s5: _2.1 _4.2 | length 11.5
  Top Layer w0.7: v1(71.501,72.288) 71.501,69.85 73.594,67.757 v1(76.251,67.757)
  Bottom Layer w0.7: _4.2 70.269,72.288 v1(71.501,72.288) ; _2.1 75.489,68.519 v1(76.251,67.757)
s6: 1_2.1 2_2.2 | length 8.2
  Bottom Layer w0.7: 2_2.2 70.269,68.377 71.296,68.377 73.863,65.81 73.863,64.328 1_2.1
s7: _1_1.1 _3_1.2 | length 9.5
  Bottom Layer w0.7: _3_1.2 71.933,65.392 71.933,61.864 73.66,60.137 _1_1.1
s8: 1_1_1.1 2_1_1.2 | length 16.4
  Bottom Layer w0.7: 2_1_1.2 70.396,63.5 67.459,60.563 67.459,57.15 68.917,55.692 1_1_1.1
v: 2_1_1_2.2 2_1_3.2 2_2_2.2 2_4.2 4.2 4_1.2 4_1_1.2 4_2.2 ?.1@118.865,102.085 ?.2@112.094,82.931 ?.2@123.959,102.131 _3_1_2.2 _3_3.2 _4_2.2 _8.2 _9.2 _9_1.2 _10.2 | length 79.1
  Top Layer w0.7: v1(112.293,81.356) 115.632,84.695 115.632,86.256 118.949,89.573 118.949,93.733 118.865,93.817 ?.1@118.865,102.085
  Bottom Layer w0.7: _8.2 2_4.2 104.432,76.327 105.771,74.988 ; _3_3.2 _3_3.2@104.559,74.988 ; 2_1_1_2.2 _3_1_2.2 104.813,66.548 104.686,66.675 2_2_2.2 _4_2.2 104.686,71.374 104.559,71.501 2_1_3.2 _3_3.2@104.559,74.988 ; 4_1_1.2 111.967,61.487 112.094,61.614 _9_1.2 112.094,65.71 111.967,65.837 4_2.2 111.967,68.012 112.094,68.139 _10.2 112.094,71.882 111.967,72.009 4_1.2 ; ?.2@112.094,82.931 ?.2@112.094,82.626 ; v1(112.293,81.356) 112.094,81.556 ?.2@112.094,82.626 ; ?.1@118.865,102.085 121.387,102.085 121.432,102.131 ?.2@123.959,102.131 ; _3_3.2@104.559,74.988 105.771,74.988 ; 105.771,74.988 111.274,74.988 111.967,74.295 4_1.2 ; 4_1.2 112.094,75.057 _9.2 112.094,78.029 111.967,78.156 4.2 111.967,82.626 ?.2@112.094,82.626
w1: ?.1@87.2,80.161 ?.1@109.394,82.931 _5.2 | length 40.5
  Top Layer w0.7: v1(103.2,87.884) v1(107.543,83.541)
  Bottom Layer w0.7: ?.1@87.2,80.161 82.461,80.161 _5.2 82.461,85.715 84.63,87.884 v1(103.2,87.884) ; v1(107.543,83.541) 109.394,83.541 ?.1@109.394,82.931
w2: 2_3.2 3.1 4.1 | length 53
  Top Layer w0.7: 85.369,86.716 85.143,86.716 84.491,86.064 86.798,83.757 86.798,80.803 v1(84.328,78.334) 85.42,78.334 87.554,76.2 v1(87.554,73.177)
  Bottom Layer w0.7: 2_3.2 82.461,78.334 v1(84.328,78.334) ; 85.369,86.716 85.398,86.745 97.621,86.745 98.183,86.182 108.243,86.182 109.834,84.591 110.668,84.591 110.668,81.208 109.267,79.807 4.1 ; 3.1 87.2,73.531 v1(87.554,73.177)
w3: _3_2.2 _6.1 _9.1 | length 51.4
  Top Layer w0.7: v1(83.82,82.169) 83.82,81.763 82.982,81.763 82.982,77.546 v1(83.82,76.708) 85.134,75.394 85.134,73.453 84.328,72.647 84.328,69.748 85.649,68.428 v1(86.004,68.428)
  Bottom Layer w0.7: _3_2.2 82.588,76.708 v1(83.82,76.708) ; v1(83.82,82.169) 87.342,85.691 96.393,85.691 96.969,85.115 101.468,85.115 107.925,78.659 107.925,77.368 108.585,76.708 _9.1 ; v1(86.004,68.428) 86.181,68.604 _6.1
w4: 2_1_2.2 3_1.1 4_1.1 | length 49.3
  Top Layer w0.7: v1(83.795,74.752) 82.982,73.939 82.982,62.611 v1(83.947,61.646) ; v1(91.186,61.341) 92.661,62.816 99.392,62.816 106.121,69.545 v1(106.121,72.415)
  Bottom Layer w0.7: 2_1_2.2 82.588,74.752 v1(83.795,74.752) ; v1(83.947,61.646) 85.063,62.762 3_1.1 87.96,62.762 89.381,61.341 v1(91.186,61.341) ; v1(106.121,72.415) 106.985,73.279 4_1.1
w5: _4_1.2 _7.1 _10.1 | length 49.9
  Top Layer w0.7: v1(99.644,79.096) 98.309,80.431 98.309,82.118 99.06,82.869 100.979,82.869 108.849,74.999 108.849,69.835 v1(108.052,69.037)
  Bottom Layer w0.7: _4_1.2 85.674,74.333 85.674,78.029 86.661,79.016 88.088,79.016 89.106,80.034 _7.1 94.92,80.034 95.02,79.934 98.806,79.934 v1(99.644,79.096) ; v1(108.052,69.037) 109.322,69.037 109.394,69.11 _10.1
w6: 2_2_1.2 3_2.1 4_2.1 | length 194
  Top Layer w0.7: v1(84.328,67.818) 84.328,65.507 86.563,63.271 86.563,61.564 85.09,60.091 80.01,60.091 79.172,60.929 79.172,81.483 76.479,84.176 76.479,101.6 80.924,106.045 109.22,106.045 112.065,103.2 112.065,99.052 117.899,93.218 117.899,90.17 109.923,82.194 106.679,82.194 ; v1(99.746,74.905) 99.053,75.598 99.053,76.436 ; v1(99.822,74.143) 99.822,75.667 99.053,76.436 ; 108.229,67.691 109.22,67.691 109.899,68.37 109.899,78.974 106.679,82.194 ; 99.053,76.436 97.257,78.232 97.257,83.185 97.993,83.922 103.2,83.922 103.203,83.919 ; 99.053,76.436 99.053,77.355 97.259,79.149 97.259,83.185 97.993,83.919 103.203,83.919 ; 103.203,83.919 104.954,83.919 106.679,82.194 ; 103.203,83.919 104.927,82.194 106.679,82.194
  Bottom Layer w0.7: 2_2_1.2 82.715,68.605 83.541,68.605 v1(84.328,67.818) ; v1(99.746,74.905) 98.908,74.066 ; v1(99.822,74.143) 99.746,74.066 98.908,74.066 ; 108.229,67.691 109.267,67.691 4_2.1 ; 3_2.1@95.045,74.066 94.564,74.066 94.564,74.192 3_2.1 94.92,74.192 3_2.1@95.045,74.066 ; 3_2.1@95.045,74.066 98.908,74.066
w7: _3_1_1.2 _6_1.1 _9_1.1 | length 48
  Top Layer w0.7: v1(91.694,68.478) 90.339,67.124 90.339,62.676 89.851,62.188 89.851,59.713 91.285,58.279 99.232,58.279 104.91,63.957 108.259,63.957 v1(109.394,62.822)
  Bottom Layer w0.7: _3_1_1.2 82.842,65.619 85.09,65.619 86.425,66.954 87.53,66.954 89.052,68.477 v1@91.695,68.477 ; v1(91.694,68.478) v1@91.695,68.477 ; _6_1.1 v1@91.695,68.477 ; v1(109.394,62.822) _9_1.1
w8: 2_1_1_1.2 3_1_1.1 4_1_1.1 | length 40.6
  Bottom Layer w0.7: 2_1_1_1.2 82.842,62.771 82.612,62.541 82.612,58.703 83.441,57.874 99.728,57.874 99.768,57.914 ; 3_1_1.1 95.047,62.635 99.768,57.914 ; 4_1_1.1 102.814,60.96 99.768,57.914
ww1: ?.18@104.267,102.03 _11_1.2 | length 6.9
  Top Layer w0.7: ?.18@104.267,102.03 104.267,100.406 105.258,99.416 v1(106.604,99.416)
  Bottom Layer w0.7: v1(106.604,99.416) 106.604,97.743 _11_1.2
ww2: 4_3_1.2 ?.17@102.997,102.03 | length 9.3
  Top Layer w0.7: ?.17@102.997,102.03 102.997,103.53
  Bottom Layer w0.7: 102.997,103.53 102.492,103.53 102.492,102.374 104.103,100.762 104.103,97.87 4_3_1.2
ww3: ?.16@101.727,102.03 _9_2_1.2 | length 4.7
  Top Layer w0.7: ?.16@101.727,102.03 101.727,100.457 v1(102.768,99.416)
  Bottom Layer w0.7: _9_2_1.2 102.768,97.997 v1(102.768,99.416)
ww4: 4_1_2_1.2 ?.15@100.457,102.03 | length 5.3
  Top Layer w0.7: ?.15@100.457,102.03 100.457,99.619 v1(100.711,99.365)
  Bottom Layer w0.7: 4_1_2_1.2 100.711,97.743 v1(100.711,99.365)
ww5: ?.14@99.187,102.03 _10_1_1.2 | length 35.8
  Top Layer w0.7: 95.86,99.496 95.86,99.543 97.372,98.03 108.881,98.03 110.911,100.059 110.911,102.083 108.052,104.942 100.344,104.942 99.187,103.784 ?.14@99.187,102.03
  Bottom Layer w0.7: 95.86,99.496 97.104,98.251 _10_1_1.2
ww6: 4_2_1_1.2 ?.13@97.917,102.03 | length 11.6
  Top Layer w0.7: ?.13@97.917,102.03 97.917,100.813 v1(98.958,99.771)
  Bottom Layer w0.7: 4_2_1_1.2 95.834,97.997 94.513,99.318 94.513,100.14 95.25,100.878 97.852,100.878 v1(98.958,99.771)
ww7: ?.12@96.647,102.03 _9_1_1_1.2 | length 13.6
  Top Layer w0.7: v1(90.602,102.286) 92.507,104.191 95.961,104.191 96.647,103.505 ?.12@96.647,102.03
  Bottom Layer w0.7: v1(90.602,102.286) 90.602,98.378 _9_1_1_1.2
ww8: 4_1_1_1_1.2 ?.11@95.377,102.03 | length 11.4
  Top Layer w0.7: 87.573,98.251 92.536,98.251 95.377,101.092 ?.11@95.377,102.03
  Bottom Layer w0.7: 87.573,98.251 4_1_1_1_1.2
xc1: 12.1 ?.1@91.821,33.958 | length 4.8
  Top Layer w0.7: 12.1 90.17,31.75 91.821,33.401 ?.1@91.821,33.958
xc2: 12.2 ?.2@93.091,33.958 | length 4.3
  Top Layer w0.7: 12.2 92.71,31.699 93.091,32.08 ?.2@93.091,33.958
xc3: 12.3 ?.3@94.361,33.958 | length 4.5
  Top Layer w0.7: ?.3@94.361,33.958 94.361,30.734 12.3
xc4: 12.4 ?.4@95.631,33.958 | length 5
  Top Layer w0.7: ?.4@95.631,33.958 95.631,32.004 12.4
xc5: 12.5 ?.5@96.901,33.958 | length 6.2
  Top Layer w0.7: ?.5@96.901,33.958 96.901,32.219 97.192,31.928 98.247,31.928 12.5
xc6: 12.6 ?.6@98.171,33.958 | length 31.8
  Top Layer w0.7: ?.6@98.171,33.958 98.171,34.925 97.536,35.56 91.059,35.56 88.519,33.02 88.519,28.194 101.219,28.194 12.6
xc7: 12.7 ?.7@99.441,33.958 | length 42.3
  Top Layer w0.7: ?.7@99.441,33.958 99.441,35.611 98.425,36.627 88.9,36.627 87.452,35.179 87.452,27.229 88.265,26.416 101.981,26.416 12.7
xc8: 12.8 ?.8@100.711,33.958 | length 9.6
  Top Layer w0.7: ?.8@100.711,33.958 100.711,32.817 101.6,31.928 105.867,31.928 12.8
pads on no net: 6.1 6.2 6.3 6.4 6.5 6.6 6.7 6.8 7.1 7.2 7.3 7.4 7.5 7.6 7.7 7.8 8.1 8.2 8.3 8.4 8.5 8.6 8.7 8.8 11.1 11.2 11.3 11.4 11.5 11.6 11.7 11.8 ?.9@135.636,71.423 ?.10@94.107,102.03 ?.10@101.981,43.258 ?.10@135.636,80.723
copper on no net: | length 0.9
  Top Layer w0.6: 197.231,0 197.358,0 198.12,0

## Keep-outs
Keep-Out Layer:
  lines w0.6: 57.277,121.793 57.277,24.511 143.637,24.511 145.034,25.908 147.066,27.94 147.066,120.269 145.669,121.666 145.415,121.92 57.912,121.92

## Text inside footprints (layer, text, board x,y; h text height)
5: Top Overlay "Block Connector" at 122.809,55.118 h1.02
?: Top Overlay "Block Connector" at 113.411,97.536 h1.02